# Allegro board PROIECTTIE.brd
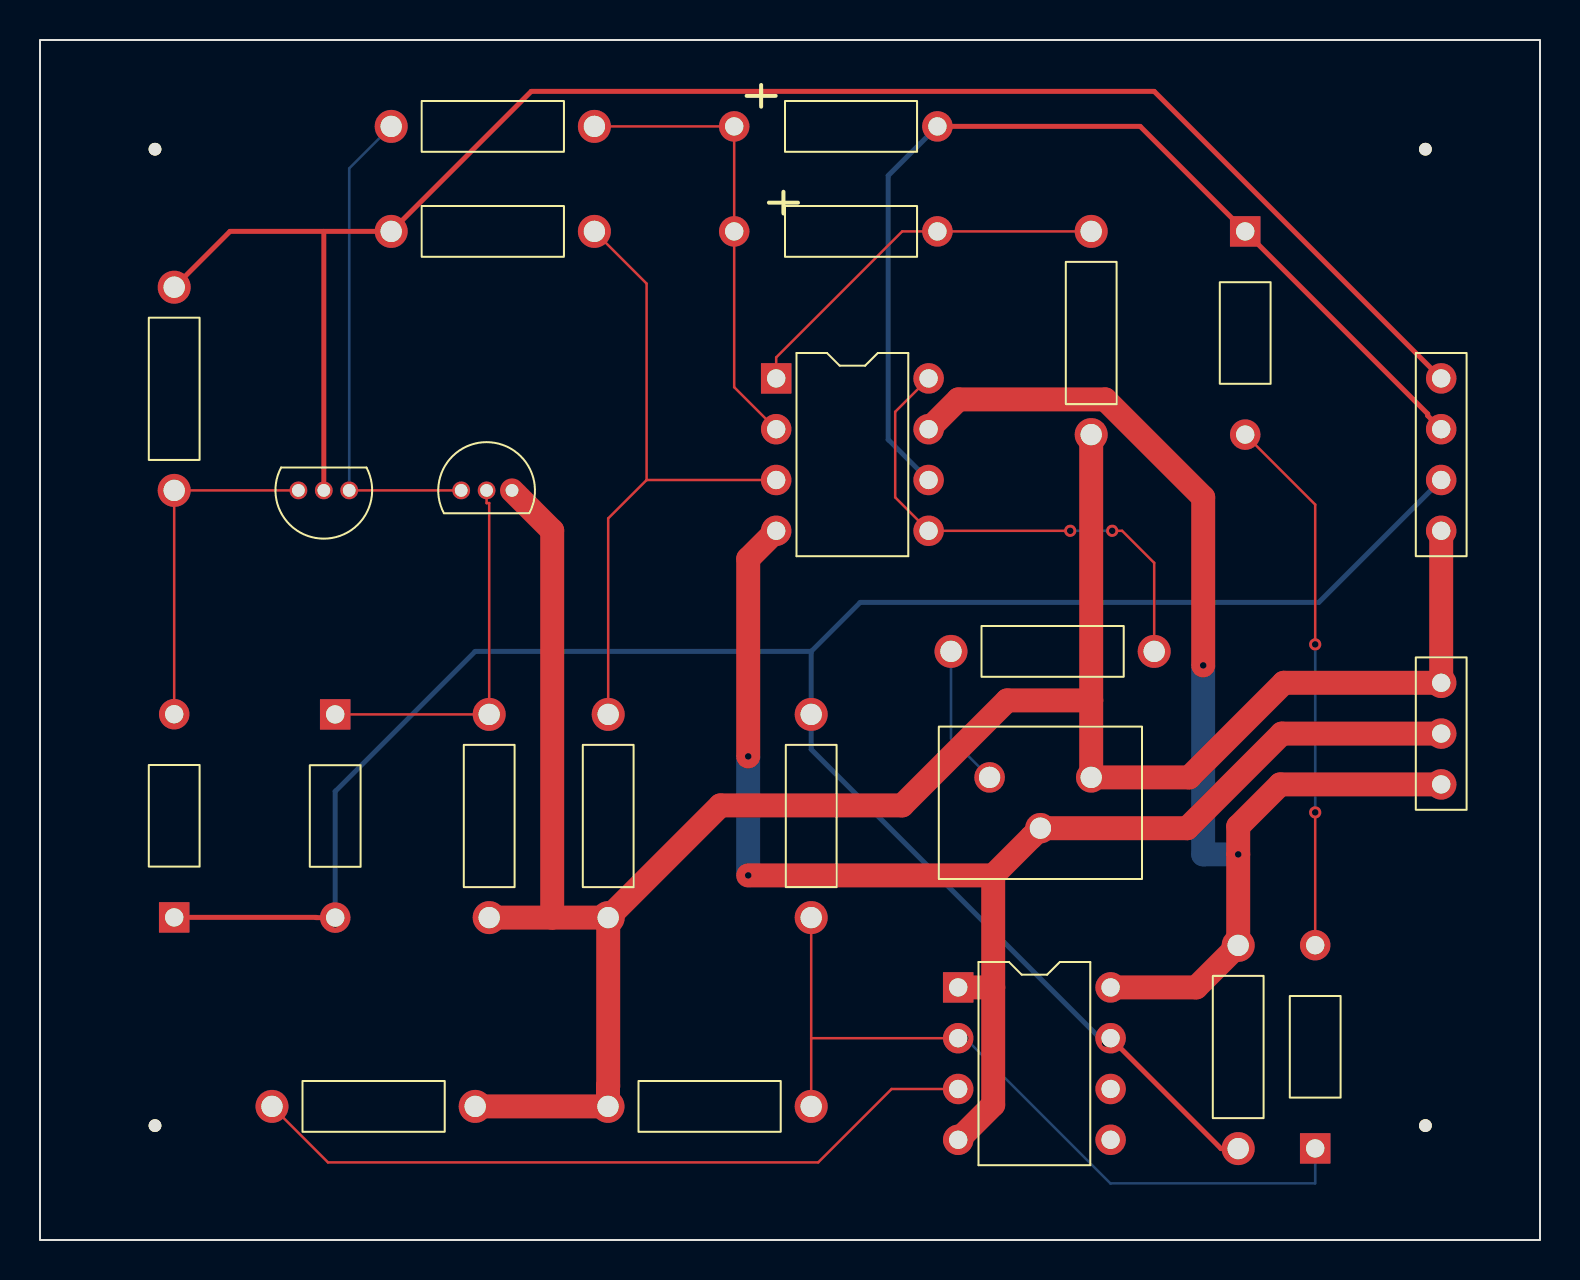
[diagram p0: board, top side]
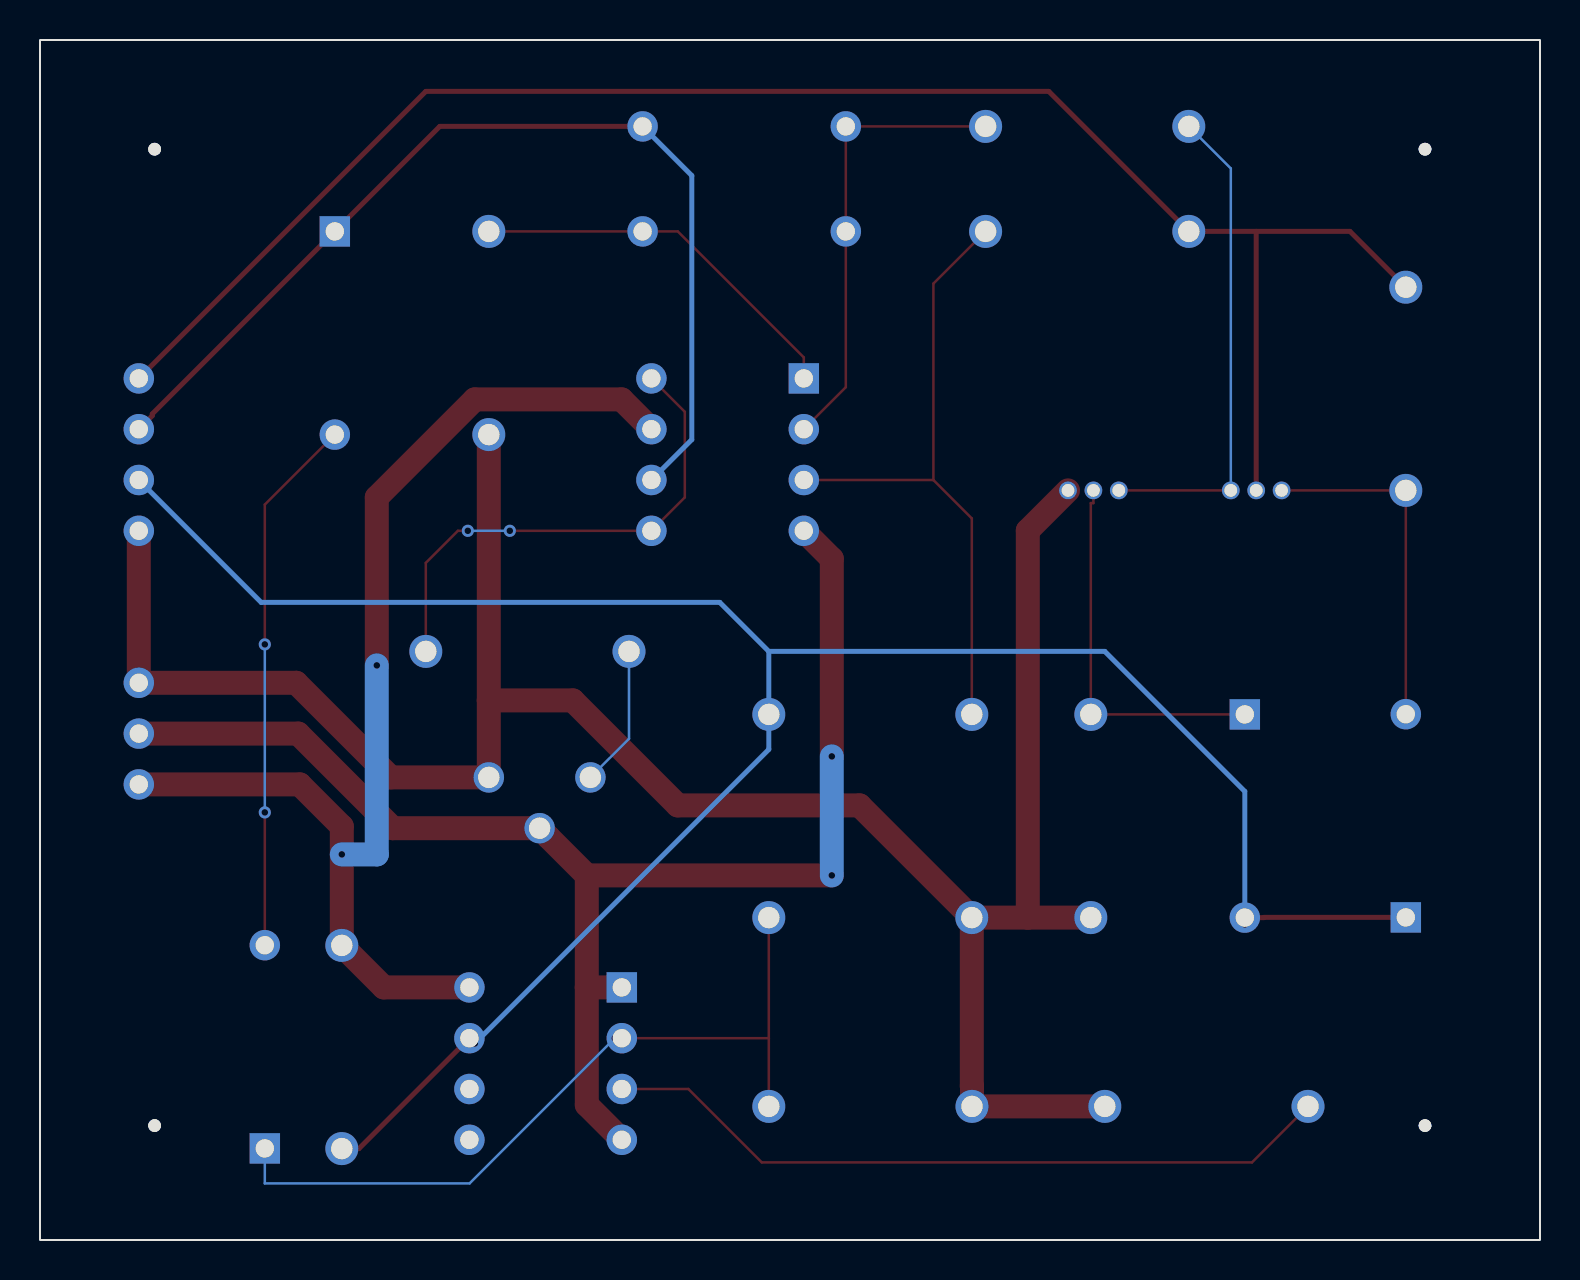
[diagram p1: board, bottom side, seen from below]

Outline 75 x 60 mm; copper layers: TOP, BOTTOM. Coordinates in mm from the lower left corner of the outline.
Outline path: rectangle 0,0 75,60

## Placement (name value [footprint] x y rotation side)
C1  1000pF  [CAP400]  34.71 55.68 270 top
C2  150pF  [CAP400]  34.71 50.43 270 top
D1  1N452  [DIO400]  6.71 16.13 0 top
D2  1N457  [DIO400]  14.76 26.28 180 top
D3  1N751  [DIO400]  60.26 50.43 180 top
D4  1N751  [DIO400]  63.76 4.58 0 top
J1  CON3  [JUMPER3]  70.06 22.78 90 top
J2  CON4  [JUMPER4]  70.06 43.08 270 top
NOREF  -  [unnamed]  69.27 54.54 0 top
NOREF#2  -  [unnamed]  5.75 5.72 0 top
NOREF#3  -  [unnamed]  69.27 5.72 0 top
NOREF#4  -  [unnamed]  5.75 54.54 0 top
Q1  2N3972  [TO92]  15.46 37.48 270 top
Q2  2N5019  [TO92]  21.06 37.48 90 top
R1  10K  [RES400]  17.56 55.68 270 top
R2  22K  [RES400]  17.56 50.43 270 top
R3  330K  [RES400]  6.71 37.48 0 top
R4  47K  [RES400]  22.46 26.28 180 top
R5  22K  [RES400]  28.41 26.28 180 top
R6  5.1M  [RES400]  55.71 29.43 90 top
R7  10M  [RES400]  52.56 50.43 180 top
R8  20K  [POT]  52.56 23.13 180 top
R9  10K  [RES400]  38.56 26.28 180 top
R10  1K  [RES400]  38.56 6.68 90 top
R11  1K  [RES400]  21.76 6.68 90 top
R12  3K  [RES400]  59.91 14.73 180 top
U1  LM111  [DIP8_3]  45.91 12.63 0 top
U2  LM101A  [DIP8_3]  36.81 43.08 0 top

## Library data of the parts
C1 C2 = C: Tolerance: ***; User Part Number: ***
D1 D2 = DIODE
D3 D4 = DIODE ZENER
J1 = CON3: User Part Number: ***
J2 = CON4: User Part Number: ***
Q1 = 2N3972
Q2 = J177
R1-R7 R9-R12 = RESISTOR: Tolerance: ***; User Part Number: ***
R8 = POT: User Part Number: ***
U1 = LM111_0: Tolerance: ***; User Part Number: ***
U2 = LM101A_3: Tolerance: ***; User Part Number: ***

## Footprints (pads in the part's own frame, mm; a bottom-side part is the same pattern mirrored in y, then rotated)
CAP400
  round 1.524 hole 0.914: 1(0,0) 2(0,10.16)
DIO400
  rect 1.524x1.524 hole 0.914: 1(0,0)
  round 1.524 hole 0.914: 2(0,10.16)
DIP8_3
  rect 1.524x1.524 hole 0.914: 1(0,0)
  round 1.524 hole 0.914: 2(0,-2.54) 3(0,-5.08) 4(0,-7.62) 5(7.62,-7.62) 6(7.62,-5.08) 7(7.62,-2.54) 8(7.62,0)
JUMPER3
  round 1.524 hole 0.914: 1(0,0) 2(2.54,0) 3(5.08,0)
JUMPER4
  round 1.524 hole 0.914: 1(0,0) 2(2.54,0) 3(5.08,0) 4(7.62,0)
POT
  round 1.524 hole 1.067: 1(0,0) 2(5.08,0) 3(2.54,2.54)
RES400
  round 1.651 hole 1.067: 1(0,0) 2(0,10.16)
TO92
  round 0.889 hole 0.635: 1(0,0) 2(0,-1.27) 3(0,-2.54)
unnamed
  round 0.635 hole 3.2 unplated: (0,0)

## Nets
+15V: J1.1 R12.1 U1.8(V+) U2.7(+VCC)
-15V: J1.2 R8.3(B) U1.1(GND) U1.4(V-) U2.4(-VCC)
GND: J1.3 J2.4 Q2.3(S) R4.2 R5.2 R7.2 R8.1(A) R10.2 R11.1
INPUT: J2.1 Q1.2(DRAIN) R2.1 R3.2
SQUARE WAVE OUTPUT: D1.1(K) D2.2(A) J2.3 R9.1 R12.2 U1.7(OUT)
TRIANGULAR WAVE OUTPUT: C1.2 D3.1(CATHODE) J2.2 U2.6(OUT)
N00510: D1.2(A) Q1.3(GATE) R3.1
N00537: Q1.1(SOURCE) Q2.1(D) R1.1
N01115: D2.1(K) Q2.2(G) R4.1
N01188: C1.1 C2.1 R1.2 U2.2(-IN)
N01195: R2.2 R5.1 U2.3(+IN)
N01837: R6.2 R8.2(WIPER)
N01891: D3.2(ANODE) D4.2(ANODE)
N01915: C2.2 R7.1 U2.1(BAL/COMP)
N02326: D4.1(CATHODE) R9.2 R10.1 U1.2(+IN)
N02424: R11.2 U1.3(-IN)
N05649: R6.1 U2.5(BAL) U2.8(COMP)

Pads without a net: U1 5 6

## Via types
v1: diameter 0.61, hole 0.33, TOP to BOTTOM, 11 vias

## Routing (per net, layer and track width the routed paths; a pad name or vN(x,y) marks a point on that pad's centre or on a via; arc(x,y) is an arc through that point)
+15V: length 60.2
  TOP w1.2: v1(58.16,28.73) 58.16,37.13 53.26,42.03 45.92,42.03 U2.7 ; U1.8 57.81,12.63 R12.1 v1(59.91,19.28) 59.91,20.68 62.01,22.78 J1.1
  BOTTOM w1.2: v1(58.16,28.73) 58.16,19.28 v1(59.91,19.28)
-15V: length 71.3
  TOP w0.127: 49.58,19.98 49.58,20.15
  TOP w1.2: J1.2 62.09,25.32 57.36,20.59 R8.3 47.66,18.23 ; 47.66,18.23 47.66,12.63 ; 47.66,18.23 v1(35.41,18.23) ; U2.4 35.41,34.06 v1(35.41,24.18) ; 47.66,12.63 47.66,6.76 U1.4 ; 47.66,12.63 U1.1
  BOTTOM w1.2: v1(35.41,18.23) v1(35.41,24.18)
GND: length 117.1
  TOP w1.2: R4.2 25.61,16.12 ; 25.61,16.12 25.61,35.47 Q2.3 ; 25.61,16.12 R5.2 ; 52.56,26.98 48.36,26.98 43.11,21.73 34.02,21.73 R5.2 ; 52.56,26.98 R7.2 ; 52.56,26.98 R8.1 57.46,23.13 62.19,27.86 J1.3 J2.4 ; R5.2 28.41,7.7 28.4,7.7 R10.2 R11.1
INPUT: length 86.3
  TOP w0.25: 14.19,50.43 R2.1 24.56,57.43 55.71,57.43 J2.1 ; 14.19,50.43 9.5,50.43 R3.2 ; 14.19,50.43 Q1.2
SQUARE WAVE OUTPUT: length 111.7
  TOP w0.25: v1(53.26,9.83) 53.26,10.09 U1.7 59.05,4.57 R12.2 ; v1(14.76,15.78) D2.2 13.81,16.12 13.81,16.13 D1.1
  BOTTOM w0.25: J2.3 63.94,31.88 41.01,31.88 38.56,29.43 ; v1(14.76,15.78) D2.2 14.76,22.43 21.76,29.43 38.56,29.43 ; 38.56,29.43 R9.1 38.56,24.53 v1(53.26,9.83)
TRIANGULAR WAVE OUTPUT: length 51
  TOP w0.25: C1.2 55.01,55.68 D3.1 69.39,41.3 69.39,41.21 J2.2
  BOTTOM w0.25: U2.6 42.41,40.02 42.41,53.22 C1.2
N00510: length 17.4
  TOP w0.127: Q1.3 R3.1 D1.2
N00537: length 24.7
  TOP w0.127: Q1.1 Q2.1
  BOTTOM w0.127: Q1.1 15.46,53.58 R1.1
N01115: length 19
  TOP w0.127: Q2.2 22.33,36.84 22.46,36.84 R4.1 D2.1
N01188: length 23
  TOP w0.127: R1.2 C1.1 C2.1 34.71,42.64 U2.2
N01195: length 32.5
  TOP w0.127: R2.2 30.33,47.82 30.33,38 ; 30.33,38 28.41,36.08 R5.1 ; 30.33,38 U2.3
N01837: length 7.1
  BOTTOM w0.127: R6.2 45.55,25.06 R8.2
N01891: length 27
  TOP w0.127: D3.2 63.76,36.77 v1(63.76,29.78) ; D4.2 v1(63.76,21.38)
  BOTTOM w0.127: v1(63.76,21.38) v1(63.76,29.78)
N01915: length 19.4
  TOP w0.127: U2.1 36.81,44.13 43.11,50.43 C2.2 R7.1
N02326: length 39.4
  TOP w0.127: v1(46.26,10.09) U1.2 38.56,10.09 ; R10.1 38.56,10.09 ; 38.56,10.09 R9.2
  BOTTOM w0.127: v1(46.26,10.09) 53.52,2.83 63.76,2.83 D4.1
N02424: length 37
  TOP w0.127: R11.2 14.4,3.88 38.91,3.88 42.58,7.55 U1.3
N05649: length 25.4
  TOP w0.127: R6.1 55.71,33.86 54.11,35.46 v1(53.61,35.46) ; U2.8 42.76,41.41 42.76,37.13 U2.5 v1(51.51,35.46)
  BOTTOM w0.127: v1(51.51,35.46) v1(53.61,35.46)

## Text on the board
XSECTION_CHART: *  SURFACE - AIR 0 MM | L1: TOP CONDUCTOR - COPPER 0.0305 MM | *  DIELECTRIC - FR-4 0.2032 MM | L2: BOTTOM CONDUCTOR - COPPER 0.0305 MM | DESIGN CROSS SECTION CHART | ___________________________ | TOTAL THICKNESS 0.2642 MM | 1-2 | FIGURE | SIZE | 0.3302 | 0.635 | 0.9144 | 1.0668 | 3.2 | DRILL CHART: TOP to BOTTOM | ALL UNITS ARE IN MILLIMETERS | PLATED | NON-PLATED | QTY | 23 | 6 | 35 | 25 | 4
